# Altium PCB Webbie-V3.0.PcbDoc (part 3 of 3)
Units mil, origin at the board's own origin, x right, y up, seen from the top; angles counter-clockwise.
Board outline 3937.01 x 1574.8 mil, 2 copper layers (Top Layer, Bottom Layer), stack 62.8 mil thick; 134 components, 93 nets, 484 pads, 190 vias.
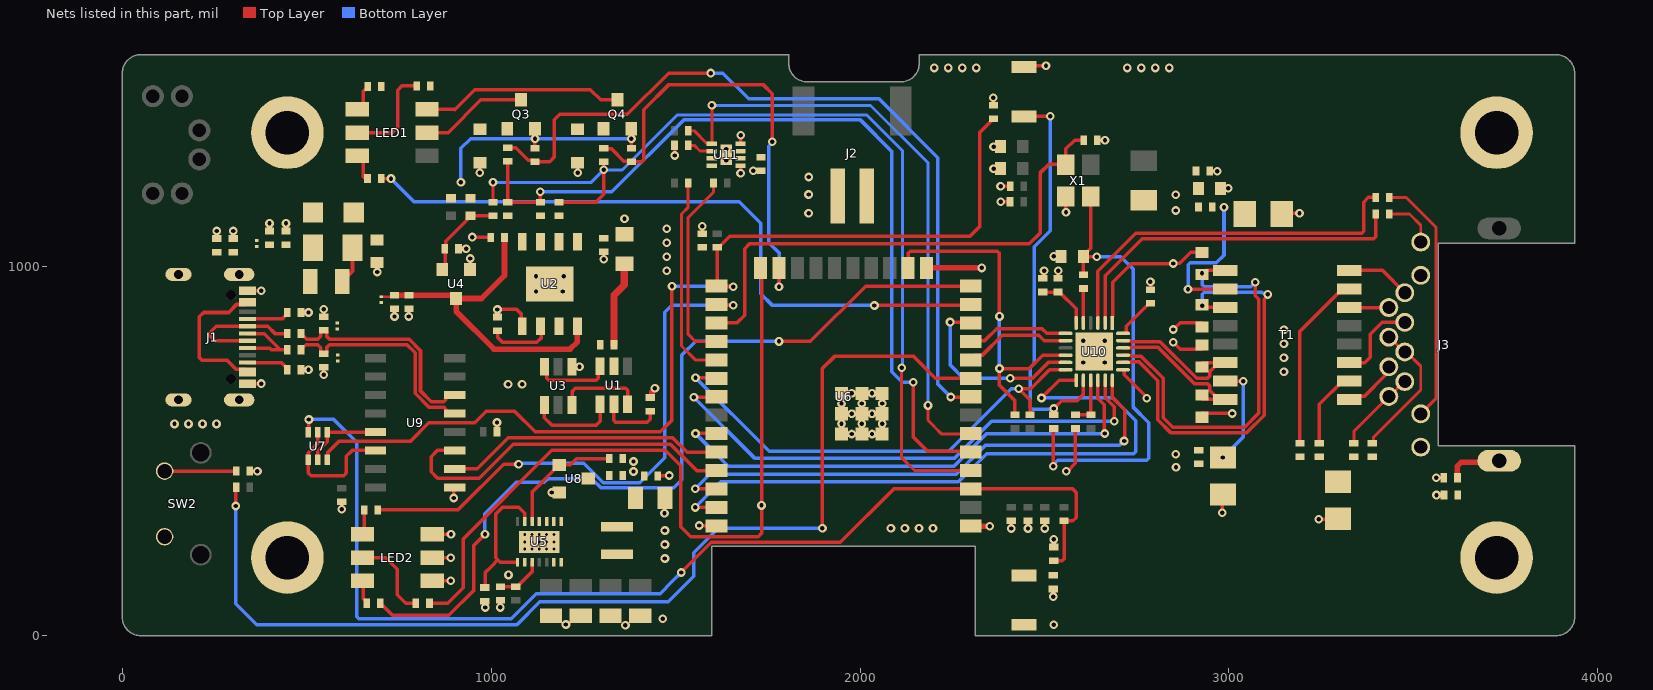
[diagram p2: the nets of this part, all layers, seen from the top]

## Via types
v1: diameter 23.62, hole 11.81, Top Layer to Bottom Layer, tented top, 190 vias

## Nets (pads, with @x,y where several pads share a name; then routed paths per layer and width w, separated by ;. In a path a pad name is that pad's centre, name@x,y a point inside that pad or via, vN(x,y) a via of type N, cw(c..) or ccw(c..) an arc to the next point about the centre after c; other vN are vias at no path point) (continued)
+3V3: C7.2 D10.1 R6.2 R8.2 U4.2 | length 240.8
  Top Layer w9.5: U4.2@867.38,992.61 875.37,1000.61 875.37,1048.22 C7.2@874.62,1048.97 876.96,1051.31 876.96,1069.29 934.75,1127.08 934.75,1131.49 941.37,1138.12 D10.1@943.78,1138.12 ; D10.1@943.78,1138.55 944.06,1138.27 1004.91,1138.27 R6.2@1005.19,1137.99
+5V_OUT: C2.1 C8.1 C9.1 C12.2 D4.2 D5.2 U2.4 U2.8 U4.3 | length 925.2
  Top Layer w7: D4.2@702,918.75 734.06,918.75 C8.1@737.98,922.67
  Top Layer w9.5: U2.4@1233.94,826.93 U2.4@1233.94,838.74
  Top Layer w15: C8.1@737.98,922.67 C9.1@776.98,922.67 896.14,922.67 904.78,914.03 U4.3@904.78,913.87 ; C2.1@1036.19,1079.32 1036.19,976.25 973.82,913.87 U4.3@904.78,913.87 ; U2.4@1233.94,826.93 1233.94,796.5 1214.02,776.58 1007.49,776.58 904.78,879.28 U4.3@904.78,913.87
ALRT: R49.1 U6.6 U11.5 | length 1661.2
  Top Layer w8: R49.1@1534.2,1368.93 1534.53,1368.59 1550.51,1368.59 1584.05,1335.06 1596.31,1335.06 U11.5@1598.22,1333.15 ; U11.5@1598.49,1335.06 v1(1598.49,1437.39) ; v1(2184.05,624.07) 2184.05,583.95 2202,566 2202,565.34 2220.34,547 2299.54,547 U6.6@2300.16,547.62
  Bottom Layer w8: v1(1598.49,1437.39) 2028.61,1437.39 2184.05,1281.95 v1(2184.05,624.07)
AVDD: C32.2 C33.1 FB2.1 J3.10 J3.12 R28.2 R29.2 R34.2 R35.2 R36.2 R37.2 U10.1 U10.19 | length 731.9
  Top Layer w9.5: U10.1@2684.25,861.95 2684.25,864.78 2685.02,865.56 2685.02,958.45 2735.17,1008.6 v1@2848.79,1008.6 ; U10.19@2712.78,720.79 2716.35,720.79 2716.38,720.75 2716.38,707.35 2777.27,646.47 2778.35,646.47 v1@2779.36,645.46 ; v1(2849.15,795.12) 2867.65,776.62 R36.2@2927.5,776.62 ; v1(2849.15,830) 2867.65,848.5 R35.2@2927.5,848.5 ; v1(2849.15,1008.96) 2849.29,1009.1 2866.87,1009.1 2896.86,1039.09 R34.2@2927.37,1039.09 ; R37.2@2927.5,603.54 2928.16,602.88 3008.52,602.88 v1(3009.18,602.21)
  other v1: 2856.5,456.5 2856.06,492.06 2777.36,643.46 2855.89,1152.51 2855.89,1195.11
B-: C1.2 U1.6 U3.3 | length 212.6
  Top Layer w9.5: U3.3@1144.39,728.57 1150.76,722.21 1150.76,697.56 1156.32,692 1285.02,692 1290.59,697.56 1290.59,725.33 U1.6@1295.39,730.13
CH: LED1.3 Q3.3 | length 275.4
  Top Layer w9.5: LED1.3@842.52,1363.31 883.26,1363.31 972.32,1452.37 Q3.3@1081,1452.37
CHG_LED: D8.1 Q3.1 R16.1 R17.2 U6.8 | length 2152.8
  Top Layer w9.5: R17.2@1045.2,1322.5 1045.47,1322.23 1066.38,1322.23 1100.14,1288.47 1114.81,1288.47 R16.1@1118.8,1284.48 1158.45,1284.48 1171.44,1297.47 1171.44,1398.44 1186,1413 1369,1413 1481,1525 v1(1595,1525) ; v1(2246.25,646.79) 2299.32,646.79 U6.8@2300.16,647.62
  Bottom Layer w9.5: v1(1595,1525) 1628,1525 1698.06,1454.94 2051.25,1454.94 2211,1295.19 2211,682.03 v1(2246.25,646.79)
CHRG: R8.1 R11.1 R17.1 U6.5 | length 2285.5
  Top Layer w9.5: R17.1@1045.2,1285.5 R8.1@1045.19,1174.99 R11.1@1133.94,1175.01 1133.47,1175.47 1133.47,1202.56 v1(1133,1203.04) ; v1(2144,687) 2144,538.34 2183.11,499.23 2298.55,499.23 U6.5@2300.16,497.62
  Bottom Layer w9.5: v1(1133,1203.04) 1327.29,1203.04 1522.09,1397.83 2001.17,1397.83 2086.44,1312.57 2086.44,715 2114.44,687 v1(2144,687)
CLK50M: C40.2 R39.1 R42.1 X1.3 | length 1270.6
  Top Layer w9.5: v1(2523.64,459) 2524.32,459.68 2524.32,560.71 R39.1@2525,561.39 ; C40.2@2605.34,1030.48 2624.99,1050.13 X1.3@2624.99,1190.3 ; R42.1@2605.47,978 2605.47,1027.85 C40.2@2605.34,1027.98 2606.32,1027 v1(2642,1027)
  Bottom Layer w9.5: v1(2523.64,459) 2523.64,462.82 2530.59,469.77 2530.59,469.91 2536.16,475.47 2776.93,475.47 2782.5,481.04 2782.5,577.42 2740,619.92 2740,994.11 2707.11,1027 v1(2642,1027)
DTR: U7.2 U7.4 U9.13 | length 216.2
  Top Layer w9.5: U7.2@530,477.2 530,499.96 555.59,525.55 U7.4@555.59,551.4 556.19,552 U9.13@686.73,552
EN: C24.1 C25.2 R27.1 SW3.2 U6.3 U7.6 | length 2999.7
  Top Layer w9.5: U7.6@504.41,551.4 505.2,552.2 505.2,585.2 v1(506,586) ; v1(1515,171) 1515,171.35 1596.47,252.81 1946.81,252.81 2091.62,397.62 U6.3@2300.16,397.62 2576.38,397.62 2586,388 2586,319.96 2577,310.96 R27.1@2556.98,310.96 ; C25.2@2524.86,203.4 2548.27,203.4 2553.84,208.96 2553.84,306.71 2552.73,307.82 R27.1@2552.73,310.96
  Bottom Layer w9.5: v1(506,586) 573,586 635.26,523.74 635.26,51.72 640.82,46.15 1054.2,46.15 1122.05,113.99 1457.99,113.99 1491.44,147.44 v1(1515,171)
ETH2X_LED1: J3.11 R41.2 | length 682.5
  Top Layer w8: R41.2@3435,1188 3480.4,1188 3560.92,1107.48 3560.92,642.12 J3.11@3520.01,601.2
ETH2X_LED2: J3.9 R43.2 | length 143.9
  Top Layer w8: R43.2@3434.5,1143 3489.79,1143 3520.01,1112.78 J3.9@3520.01,1066.95
ETH2X_RX_N: R37.1 T1.8 U10.22 | length 407.6
  Top Layer w9.5: U10.22@2712.78,779.84 2712.82,779.88 2734.15,779.88 2736.71,782.44 2807.06,782.44 2906.53,682.96 2941.9,682.96 2947.46,677.4 2947.46,664.71 2972.17,640 T1.8@2990.09,640 2989.55,640.54 R37.1@2927.5,640.54
ETH2X_RX_P: R36.1 T1.6 U10.23 | length 407.1
  Top Layer w9.5: U10.23@2712.78,799.53 U10.23@2712.78,799.53 2734.15,799.49 2736.71,796.94 2813.07,796.94 2912.54,697.46 2941.9,697.46 2947.46,703.03 2947.46,715.29 2972.17,740 T1.6@2990.09,740 2989.7,739.62 R36.1@2927.5,739.62
ETH2X_TX_N: R35.1 T1.3 U10.20 | length 1154.6
  Top Layer w9.5: U10.20@2712.78,740.47 U10.20@2712.78,740.47 2734.15,740.51 2736.71,743.06 2755.71,743.06 2807.32,691.46 2807.32,584.91 2841.72,550.5 3048.64,550.5 3095.5,597.36 3095.5,911.66 3105.06,921.22 v1(3105.06,925.04) ; v1(2928.08,894.64) 2931.9,894.64 2936.55,890 T1.3@2990.09,890
  Bottom Layer w9.5: v1(2928.08,894.64) 2927.57,895.15 2927.57,925.72 2933.14,931.29 3088.83,931.29 3092.37,927.74 3102.36,927.74 v1(3105.06,925.04)
ETH2X_TX_P: R34.1 T1.1 U10.21 | length 1134.4
  Top Layer w9.5: U10.21@2712.78,760.16 2712.82,760.12 2734.15,760.12 2736.71,757.56 2761.71,757.56 2821.82,697.46 2821.82,590.91 2847.73,565 3042.63,565 3081,603.37 3081,911.54 3071.44,921.1 v1(3071.44,957.85) ; v1(2927.06,982.44) 2930.88,982.44 2938.45,990 T1.1@2990.09,990
  Bottom Layer w9.5: v1(2927.06,982.44) 2927.06,951.86 2933.14,945.79 3058.81,945.79 3070.87,957.85 v1(3071.44,957.85)
ETHERNET: R15.1 U6.14 | length 2309.5
  Top Layer w9.5: R15.1@699.66,88.03 699.66,84.53 703.91,80.28 707.41,80.28 732.69,55 885.41,55 952.28,121.88 952.28,243.87 v1(983.26,274.86) ; v1(1780.47,797.62) 1865.38,797.62 2015.38,947.62 U6.14@2300.16,947.62
  Bottom Layer w9.5: v1(983.26,274.86) 983.26,330.82 1068.08,415.64 1144.45,415.64 1154.31,425.5 1272.58,425.5 1297.69,400.39 1495.05,400.39 1517,422.34 1517,760.62 1554.38,798 1780.09,798 v1(1780.47,797.62)
FL: LED1.1 Q4.3 | length 534.1
  Top Layer w9.5: LED1.1@842.52,1426.3 900.7,1426.3 901,1426 955.23,1480.23 1268.77,1480.23 1296.63,1452.37 Q4.3@1342.48,1452.37
FULL_LED: D9.1 Q4.1 R18.2 R31.1 U6.23 | length 1238.8
  Top Layer w9.5: R18.2@1305.08,1321.48 1306.77,1319.79 1326.34,1319.79 1359.75,1286.37 1377.98,1286.37 R31.1@1380.19,1284.16 ; R31.1@1380.27,1284.24 1408.49,1284.24 1414.06,1289.8 1414.06,1426.06 1482,1494 1737,1494 1762,1469 v1(1762,1339.06) ; v1(1780.47,945.96) U6.23@1780.47,996.83
  Bottom Layer w9.5: v1(1762,1339.06) 1762,1335.43 1753,1326.43 1753,1065.28 1781,1037.28 1781,946.48 v1(1780.47,945.96)
GND: C2.2 C3.1 C4.2 C5.2 C6.1 C7.1 C8.2 C9.2 C10.2 C11.2 C12.1 C13.1 C14.1 C15.1 C16.1 C17.1 C18.1 C19.1 C20.2 C21.1 C22.1 C23.1 C24.2 C25.1 C26.2 C27.1 C28.2 C29.2 C30.1 C31.2 C32.1 C33.2 C34.1 C35.2 C36.2 C37.1 C38.1 C39.1 C40.1 C41.1 C42.2 C43.2 C44.1 D1.2 D4.1 D6.1 D7.1 D8.2 D9.2 J1.A1B12 J1.B1A12 J2.2 LED2.2 LED2.4 LED2.6 pad.10 R2.1 R3.1 R4.2 R5.1 R7.1 R9.1 R19.1 R24.1 R44.1 R47.2 R50.1 R53.2 SW2.2 SW3.1 SW4.1 U2.1 U2.3 U2.9 U3.1 U4.1 U5.2 U5.15 U6.1 U6.15 U6.38 U6.39 U6.39_10 U6.39_11 U6.39_12 U6.39_13 U6.39_14 U6.39_15 U6.39_16 U6.39_17 U6.39_18 U6.39_19 U6.39_20 U6.39_21 U6.40 U6.41 U6.42 U6.43 U6.44 U6.45 U6.46 U6.47 U8.2 U9.1 U10.25 U11.1 U11.4 U11.9 X1.2 | length 2181.2
  Top Layer w9.5: R7.1@256,1076.5 v1(256,1097) ; C6.1@301,1076.5 v1(301,1097) ; J1.B1A12@339.29,683.19 v1(377.14,683.22) ; J1.A1B12@339.31,935.14 v1(377.18,935.11) ; C10.2@345.93,446 v1(366.43,446) ; C4.2@399,1097 v1(399,1117.5) ; C5.2@444,1097 v1(444,1117.5) ; R5.1@484.51,720.5 v1(505.01,720.5) ; R2.1@484.49,876 v1(504.99,876) ; v1(546.01,707) C14.1@546.01,727.5 ; C13.1@546.01,864.5 v1(546.01,885) ; v1(595.21,342.31) C29.2@595.21,362.81 ; C12.1@691,1012 691.33,1011.67 v1(691.33,985.68) ; v1(737.98,865.17) C8.2@737.98,885.67 ; v1(776.98,865.17) C9.2@776.98,885.67 ; LED2.2@842.52,148.5 v1(890.82,148.5) ; LED2.4@842.52,211.49 v1(890.82,211.49) ; LED2.6@842.52,274.49 842.89,274.86 v1(891.19,274.86) ; v1(898.42,373.02) 898.42,399.14 U9.1@901.27,402 ; C7.1@911.62,1048.97 v1(932.12,1048.97) ; U4.1@942.18,992.61 943.28,993.72 v1(943.28,1022.43) ; v1(948.82,1080.38) 949.35,1079.85 998.66,1079.85 C2.2@999.19,1079.32 ; v1(969.12,1254.56) 969.12,1280.84 D8.2@970,1281.72 ; C20.2@982.77,93.59 983.26,93.1 983.26,76.71 v1(983.76,76.21) ; C28.2@1015.9,552.43 v1(1015.91,577.69) ; R4.2@1016.94,863.74 v1(1016.94,884.24) 1069.05,884.24 1082.25,871.04 1082.25,840.43 U2.1@1083.94,838.74 ; v1(1025,76.56) R24.1@1025,95.49 ; v1(1164.1,388.1) U8.2@1184.59,388.1 ; U3.1@1219.2,728.57 v1(1239.69,728.57) ; D9.2@1234,1281.72 1234.42,1281.3 v1(1234.42,1254.66) ; v1(1305.3,1020.06) C3.1@1305.3,1040.56 ; C11.2@1452.04,433.49 v1@1482.47,433.49 ; 1469.47,433.49 1469.94,433.96 ; v1(1469.94,331.45) 1469.94,371.94 C19.1@1471,373 ; R50.1@1497.19,1329.56 1497.51,1329.24 1497.51,1301.9 v1(1497.84,1301.58) ; v1(1564.23,298.43) 1610.37,298.43 U6.38@1611.18,297.62 ; C27.1@1572,1089.5 v1(1572,1110) ; v1(1676.17,1253.6) U11.1@1676.17,1274.09 ; U11.4@1676.17,1333.15 1676.4,1333.38 1676.4,1356.42 v1(1676.63,1356.65) ; v1(1710.7,1260.12) C43.2@1731.2,1260.12 ; v1@2360.5,1266 C34.1@2381,1266 ; v1@2360.5,1325.55 C38.1@2381,1325.55 ; C26.2@2361.47,1437.78 v1(2361.47,1458.28) ; v1(2381,1217.86) 2381.07,1217.93 2406.75,1217.93 C35.2@2406.82,1218 ; v1(2381.07,1176) C36.2@2406.5,1176 ; v1(2409.97,290.46) C23.1@2409.97,310.96 ; SW4.1@2444.97,1541.59 2447.89,1544.51 v1(2504.29,1544.51) ; v1(2455.22,290.46) C22.1@2455.22,310.96 ; C31.2@2495.56,968.5 2497.23,970.17 2497.23,987.32 v1(2498.9,989) ; v1(2500.48,290.46) C21.1@2500.48,310.96 ; v1(2523.86,105.9) C24.2@2523.86,126.4 ; C25.1@2524.86,240.4 v1(2524.86,260.89) ; v1(2524.84,1027.98) C40.1@2545.34,1027.98 ; C30.1@2537,968.5 v1(2537,989) ; X1.2@2558.06,1190.3 2558.21,1190.15 v1(2558.21,1147.9) ; v1(2559,446) 2562.82,446 2583.82,467 C37.1@2583.82,561.41 ; R47.2@2643.49,1343.05 v1(2663.98,1343.05) ; v1(2787.17,959.71) 2787.43,959.44 2787.43,938.38 R44.1@2787.7,938.12 ; C33.2@2947.87,1259.22 v1(2968.37,1259.22) ; C32.1@2977.37,1212.61 v1(2997.87,1212.61) ; v1(2982,333) 2982,381.5 C41.1@2983.5,383 ; C39.1@3143,1143 3144.87,1144.87 v1(3191.45,1144.87) ; v1(3243.83,315.64) 3294.64,315.64 C44.1@3296,317 ; v1(3562,428) R53.2@3582.5,428 ; v1(3562.5,381) C42.2@3583,381
  Top Layer w15: R3.1@1431.03,645.48 1434.53,645.48 1436.03,646.98 1436.03,660.41 1443.91,668.3 v1(1443.91,670.63) ; U6.15@2180.47,996.83 v1(2329.69,996.83) ; U6.1@2300.16,297.62 2300.64,297.14 2351.06,297.14 v1(2351.54,296.65)
  other v1: 1364.01,28.31 1202.65,30.18 2524.86,29.57 1465,46 1047.07,164.59 1471,209 1471,247 1471,285 2083.67,290.79 2121.67,290.79 2159.67,290.79 2197.67,290.79 1482.94,433.96 141.51,574 179.51,574 217.51,574 255.51,574 1045.9,681.37 1083.9,681.37 3149,715 2663.56,740.47 2605.47,740.51 3149,753 3149,791 2663.56,798.95 2605.47,799.53 3149,829 1121.44,932.75 1194,932.75 1121.44,974.5 1196.44,974.5 1475.94,989 1475.94,1027 1475.94,1065 1475.94,1103 1860.52,1145 1860.52,1195.74 1860.85,1243.18 2362,1266 1637.2,1288.12 1637.2,1319.37 2362,1325.55 2201,1539 2239,1539 2277,1539 2315,1539 2724,1539 2762,1539 2800,1539 2838,1539
IO0: C26.1 C27.2 R30.1 R39.2 SW4.2 U6.25 U7.3 U10.14 | length 3859.6
  Top Layer w9.5: U7.3@555.59,476.6 557.7,478.71 557.7,497.49 587.79,527.59 781.83,527.59 831.24,577 955.9,577 987.15,608.25 1063.4,608.25 1119.22,552.43 1458.57,552.43 1490.19,584.05 v1(1490.19,947.23) ; v1(1656,945.96) 1612.85,945.96 U6.25@1611.18,947.62 1613,949.44 R30.1@1613,1052.5 1616.5,1052.5 1647,1083 2298,1083 2325.12,1110.12 2325.12,1364.72 2356.74,1396.34 2361.18,1400.78 C26.1@2361.47,1400.78 ; SW4.2@2444.97,1407.73 v1(2515.54,1407.73) ; R39.2@2525,598.39 2525.22,598.61 2525.22,615.57 v1(2525.44,615.79) 2546.3,636.65 2588.55,636.65 2605.47,653.57 U10.14@2605.47,692.22
  Bottom Layer w9.5: v1(1490.19,947.23) 1654.73,947.23 v1(1656,945.96) ; v1(2515.54,1407.73) 2515.54,1097.72 2472.34,1054.52 2472.34,737.46 2461,726.12 2461,619.56 2466.57,613.99 2523.64,613.99 v1(2525.44,615.79)
IO4: R26.1 U6.26 | length 1513.3
  Top Layer w9.5: R26.1@692.54,340.6 909.94,340.6 1034.09,464.76 v1(1074.39,464.76) ; U6.26@1611.18,897.62 1612.8,896 v1(1656,896)
  Bottom Layer w9.5: v1(1074.39,464.76) 1077.09,467.46 1251.13,467.46 1303.69,414.89 1402.93,414.89 1470.47,482.44 1470.47,876.29 1490.19,896 v1(1656,896)
IO13_RMII_EMAC_RX_ER: R40.1 U6.16 U10.10 | length 941.9
  Top Layer w9.5: U6.16@2130.47,996.83 2130.09,997.21 2130.09,1036.43 2135.66,1042 2372.43,1042 2378,1036.43 v1(2378,865.34) ; R40.1@2419.92,598.41 2419.92,636.49 2378,678.41 v1(2378,724) 2458.88,724 2495.04,760.16 U10.10@2557.22,760.16
  Bottom Layer w9.5: v1(2378,724) v1(2378,865.34)
IO16_OSC_EN: R47.1 U6.27 X1.1 | length 1427.7
  Top Layer w9.5: U6.27@1611.18,847.62 1665.62,847.62 1687,869 1687,1048.8 1700.38,1062.19 2459.13,1062.19 2488,1091.06 2488,1254 2511.27,1277.27 X1.1@2557.7,1277.27 ; X1.1@2556.84,1278.13 X1.1@2558.06,1276.92 2558.06,1319.43 2581.68,1343.05 R47.1@2606.49,1343.05
IO18_RMII_MDIO: R38.1 U6.30 U10.12 | length 1319.1
  Top Layer w9.5: v1(1554,699) 1609.8,699 U6.30@1611.18,697.62 ; R38.1@2461,598.41 2461,638.42 v1(2430,669.42) 2462.32,669.42 2513.68,720.79 U10.12@2557.22,720.79
  Bottom Layer w9.5: v1(1554,699) 1753.42,499.58 2240.1,499.58 2409.95,669.42 v1(2430,669.42)
IO19_RMII_EMAC_TXD0: U6.31 U10.17 | length 1433.1
  Top Layer w9.5: v1(1549.62,645.88) 1609.44,645.88 U6.31@1611.18,647.62 ; U10.17@2664.53,692.22 2664.53,644.64 2688.92,620.24 v1(2688.92,581.25)
  Bottom Layer w9.5: v1(1549.62,645.88) 1715.29,480.21 2255.36,480.21 2356.39,581.25 v1(2688.92,581.25)
IO21_RMII_EMAC_TX_EN: U6.33 U10.16 | length 1392.1
  Top Layer w9.5: v1(1554,548) 1610.8,548 U6.33@1611.18,547.62 ; U10.16@2644.84,692.22 2644.84,643.82 2662.36,626.3 2662.36,548.59 v1(2663.14,547.81)
  Bottom Layer w9.5: v1(1554,548) 1643,459 2254.65,459 2343.46,547.81 v1(2663.14,547.81)
IO22_RMII_EMAC_TXD1: U6.36 U10.18 | length 1453.5
  Top Layer w9.5: v1(1553.3,398) 1610.81,398 U6.36@1611.18,397.62 ; U10.18@2684.21,692.22 2684.21,645.46 2717.65,612.02 2717.65,529.43 v1(2715.78,527.56)
  Bottom Layer w9.5: v1(1553.3,398) 1592.3,437 2260.91,437 2339.41,515.5 2703.15,515.5 2715.21,527.56 v1(2715.78,527.56)
IO23_RMII_MDC: U6.37 U10.13 | length 1793.6
  Top Layer w9.5: v1(1553,347.62) U6.37@1611.18,347.62 ; v1(2492,644.38) 2539.84,692.22 U10.13@2585.79,692.22
  Bottom Layer w9.5: v1(1553,347.62) 1622.38,417 2266.78,417 2343.28,493.5 2742.09,493.5 2747.66,499.06 2747.66,582.01 2685.26,644.42 v1(2492,644.38)
IO25_RMII_EMAC_RXD0: U6.10 U10.8 | length 291
  Top Layer w9.5: U6.10@2300.16,747.62 2313.12,760.59 2332.04,760.59 2385.95,814.5 2484.35,814.5 2499.33,799.53 U10.8@2557.22,799.53
IO26_RMII_EMAC_RXD1: U6.11 U10.7 | length 276.6
  Top Layer w9.5: U6.11@2300.16,797.62 2302.5,799.96 2338.37,799.96 2370.41,832 2493.27,832 2506.06,819.21 U10.7@2557.22,819.21
IO27_RMII_EMAC_CRS_DV: U6.12 U10.11 | length 519.4
  Top Layer w9.5: v1(2244.07,850) 2297.78,850 U6.12@2300.16,847.62 ; v1(2407.42,697.44) 2467.61,697.44 2510.64,740.47 U10.11@2557.22,740.47
  Bottom Layer w9.5: v1(2244.07,850) 2244.07,733.61 2280.24,697.44 v1(2407.42,697.44)
IO33: C10.1 R20.1 SW2.1 U6.9 | length 3143.3
  Top Layer w9.5: SW2.1@114.84,446 C10.1@308.93,446 ; v1(307.76,351.42) 308.34,352.01 308.34,401.41 R20.1@308.93,401.99 ; v1(1898,291) 1898,724 1932,758 2144,758 2204.38,697.62 U6.9@2300.16,697.62
  Bottom Layer w9.5: v1(307.76,351.42) 307.76,86.73 364.48,30 1070.01,30 1132,91.99 1479.99,91.99 1549,161 1549,224.75 1615.25,291 v1(1898,291)
"LOW BATT": R13.1 U6.13 | length 1854.1
  Top Layer w9.5: R13.1@701.78,1238.97 v1@728.35,1238.97 ; v1(2039,895) 2297.54,895 U6.13@2300.16,897.62
  Bottom Layer w9.5: v1(728.38,1238.94) 790.84,1176.47 1672.53,1176.47 1730.59,1118.41 1730.59,927.06 1762.66,895 v1(2039,895)
NetC1_1: C1.1 R1.1 U1.5 | length 231.9
  Top Layer w20: C1.1@1333.01,788.65 1333.08,788.72 1333.08,922.59 1361,950.51 R1.1@1361,1009
NetC6_2: C6.2 J1.13 R7.2
NetC20_1: C20.1 U5.1 U5.13 | length 380.6
  Top Layer w9.5: C20.1@982.77,130.59 983.96,131.78 983.96,171.24 1001.16,188.44 1018.35,205.64 ; U5.1@1071.44,199.06 1024.94,199.06 1012.5,211.49 1012.5,329.86 1030.64,348 1074.99,348 1091.1,331.89 U5.13@1091.1,316.35
NetC39_2: C39.2 R28.1 T1.2 | length 405.3
  Top Layer w9.5: v1(2889,939) 2989.09,939 T1.2@2990.09,940
  Bottom Layer w9.5: v1@2889.22,939.22 2889.22,1004.93 2894.78,1010.5 2965.5,1010.5 2986.62,1031.62 v1(2986.62,1161.29)
NetC41_2: C41.2 R29.1 T1.7 | length 279
  Top Layer w9.5: T1.7@2990.09,690 2990.19,689.89 v1(3039.13,689.89)
  Bottom Layer w9.5: v1(2983.5,483) 3039.13,538.63 v1(3039.13,689.89)
NetC42_1: C42.1 J3.14 R53.1 | length 150.6
  Top Layer w15: R53.1@3619.5,428 3619.5,459.5 3630.48,470.48 3729.05,470.48 J3.14@3732.61,474.04
NetC44_2: C44.2 R46.1 R48.1 R51.1 R52.1
NetD5_1: D5.1 FB1.2
NetF1_2: F1.2 FB1.1 | length 103.5
  Top Layer w9.5: F1.2@596.31,960 624.17,987.86 FB1.1@624.17,1051.99
NetJ1_A5: J1.A5 R2.2 | length 117.6
  Top Layer w9.5: J1.A5@339.29,858.39 433.38,858.39 447.49,872.5 R2.2@447.49,876
NetJ1_A6: J1.A6 J1.B6 R23.2 | length 217.1
  Top Layer w9.5: J1.B6@339.29,779.65 399.35,779.65 404,775 447.44,775 R23.2@447.49,774.94 ; J1.A6@339.65,818.66 384.78,818.66 428.49,774.95
NetJ1_A7: J1.A7 J1.B7 R22.2 | length 340.9
  Top Layer w9.5: J1.A7@339.29,799.33 251.69,799.33 237.48,813.54 237.48,821.41 254.77,838.7 J1.B7@339.29,838.7 394.3,838.7 414.08,818.92 R22.2@447.49,818.92
NetJ1_B5: J1.B5 R5.2 | length 118.5
  Top Layer w9.5: J1.B5@339.29,740.28 431.23,740.28 447.51,724 R5.2@447.51,720.5
NetJ3_1: J3.1 T1.16 | length 175.8
  Top Layer w9.5: T1.16@3325.91,990 3416.25,990 J3.1@3476.7,929.55
NetJ3_2: J3.2 T1.14 | length 107.7
  Top Layer w9.5: T1.14@3325.91,890 3326.52,889.39 J3.2@3433.39,889.39
NetJ3_3: J3.3 T1.11 | length 232.7
  Top Layer w9.5: T1.11@3325.91,740 3368.65,740 3383,754.35 3383,816.94 3415.3,849.24 J3.3@3476.7,849.24
NetJ3_4: J3.4 J3.5 R51.2 | length 382.5
  Top Layer w8: R51.2@3388.63,521.5 3392.03,524.9 3392.03,537.81 3520.01,665.79 3520.01,730.35 3481.44,768.92 J3.5@3476.7,768.92 3475.13,768.92 3434.97,809.08 J3.4@3433.39,809.08
NetJ3_6: J3.6 T1.9 | length 152.1
  Top Layer w9.5: T1.9@3325.91,640 3334.3,648.39 3366.51,648.39 3425.42,707.3 3425.42,720.79 J3.6@3433.39,728.76
NetJ3_7: J3.7 J3.8 R52.2 | length 226.2
  Top Layer w8: R52.2@3338.49,521.5 3338.49,553.55 J3.8@3433.39,648.45 3434.97,648.45 3475.13,688.61 J3.7@3476.7,688.61
NetL1_1: L1.1 U5.8 U5.9
NetL1_2: L1.2 U5.6 U5.7
NetLED1_2: LED1.2 R9.2 | length 68.1
  Top Layer w9.5: LED1.2@653.54,1426.3 653.54,1475.07 659.11,1480.63 661.02,1480.63 665.27,1484.88 R9.2@665.27,1488.38
NetLED1_4: LED1.4 R19.2 | length 255.5
  Top Layer w9.5: LED1.4@653.54,1363.31 731.46,1363.31 746.33,1378.18 746.33,1478.14 758.49,1490.3 R19.2@797.91,1490.3
NetLED1_6: LED1.6 R13.2 | length 69.3
  Top Layer w9.5: LED1.6@653.54,1300.32 653.54,1244.49 659.03,1239 R13.2@664.74,1239
NetLED2_1: LED2.1 R15.2 | length 64.2
  Top Layer w9.5: LED2.1@653.54,148.5 653.54,100.65 662.66,91.53 R15.2@662.66,88.03
NetLED2_3: LED2.3 R25.2 | length 234.4
  Top Layer w9.5: LED2.3@653.54,211.49 714.51,211.49 745.79,180.21 745.79,110.49 768.29,88 R25.2@796,88
NetLED2_5: LED2.5 R26.2 | length 66.9
  Top Layer w9.5: LED2.5@653.54,274.49 655.54,276.48 R26.2@655.54,340.6
NetR3_2: R3.2 U1.2 | length 170.5
  Top Layer w9.5: U1.2@1332.8,626.98 1331.98,626.17 1331.98,583.48 1337.54,577.91 1422.02,577.91 1431.03,586.92 R3.2@1431.03,608.48
NetR4_1: R4.1 U2.2 | length 179.6
  Top Layer w9.5: R4.1@1016.94,826.74 1016.94,823.18 1017.63,822.49 1017.63,808.03 1030.73,794.93 1123.72,794.93 1135.22,806.43 1135.22,837.45 U2.2@1133.94,838.74
NetR10_2: R10.2 U2.6
NetR11_2: R11.2 U2.7
NetR14_1: R14.1 R24.2 U5.3 | length 125.5
  Top Layer w9.5: R24.2@1025,133.49 1025.5,132.99 1066.21,132.99 R14.1@1066.71,132.49 ; R14.1@1070.21,132.49 1110.81,173.09 U5.3@1110.81,199.06
NetR41_1: R41.1 U10.3 | length 1022.3
  Top Layer w9.5: U10.3@2644.84,847.78 2644.84,987.47 2747.73,1090.36 3359.44,1090.36 3365,1095.92 3365,1175.03 3377.97,1188 R41.1@3398,1188
NetR43_1: R43.1 U10.2 | length 966.2
  Top Layer w9.5: U10.2@2664.53,847.78 2664.53,975.59 2764.79,1075.86 3391.94,1075.86 3397.5,1081.42 R43.1@3397.5,1143
NetR44_2: R44.2 U10.24 | length 120
  Top Layer w9.5: U10.24@2712.78,819.21 2721.3,819.21 2721.34,819.25 2721.34,838.25 2784.2,901.12 R44.2@2787.7,901.12
NetR46_2: R46.2 T1.10 | length 212.5
  Top Layer w9.5: R46.2@3245,521.5 3245,627 3308,690 T1.10@3325.91,690
NetR48_2: R48.2 T1.15 | length 484.2
  Top Layer w9.5: R48.2@3192.63,521.5 3192.63,824.63 3308,940 T1.15@3325.91,940
NetR50_2: R50.2 U11.6 | length 70.7
  Top Layer w8: R50.2@1534.19,1329.56 1534.57,1329.18 1550.5,1329.18 1566.22,1313.46 U11.6@1598.22,1313.46
NetU1_1: U1.1 U3.4 | length 243.8
  Top Layer w9.5: U3.4@1144.39,625.43 1144.39,591.16 1165.05,570.5 1284.28,570.5 1295.39,581.61 U1.1@1295.39,626.98
NetU1_3: U1.3 U3.6 | length 231.3
  Top Layer w9.5: U3.6@1219.2,625.43 1219.2,661.59 1228.24,670.63 1364.56,670.63 1370.2,665 U1.3@1370.2,626.98
nRST: C37.2 R45.1 U10.15 | length 136.1
  Top Layer w9.5: C37.2@2583.82,598.41 R45.1@2625.82,598.41 2625.2,599.03 U10.15@2625.16,692.22 U10.15@2625.16,692.22
OR_3.3V: D10.2 D11.2 Q3.2 Q4.2 R16.2 R31.2 | length 670.3
  Top Layer w9.5: Q3.2@1118.4,1373.63 1118.8,1373.23 v1(1118.8,1347.35) R16.2@1118.8,1321.48 ; Q4.2@1379.89,1373.63 1380.27,1373.25 v1(1380.27,1347.24) R31.2@1380.27,1321.24
  Bottom Layer w9.5: v1(918,1228.85) 918,1321 944.35,1347.35 v1(1118.8,1347.35) 1118.86,1347.3 1380.21,1347.3 v1(1380.27,1347.24)
OSCIN: R42.2 U10.5 | length 93.2
  Top Layer w9.5: U10.5@2605.47,847.78 R42.2@2605.47,941
OUT/BATT+: C3.2 C11.1 C19.2 C43.1 J2.1 R1.2 R12.1 R21.1 U2.5 U5.10 U5.11 U8.3 U11.2 U11.3 | length 2.8
  Top Layer w15: J2.1@2018,1192 J2.1@2020,1190
  other v1: 1385.85,445.07 1385.85,471.99 1361.5,1129.91
RST: R12.2 R21.2 U5.12 U8.1 | length 327.9
  Top Layer w9.5: U5.12@1110.81,309.29 1110.81,389.12 1171.23,449.54 1171.23,451.51 1182.62,462.9 1214.34,462.9 1231.4,479.96 R21.2@1320.07,479.96
RTS: U7.1 U7.5 U9.14 | length 361.6
  Top Layer w9.5: U7.5@530,551.4 530,521.48 504.41,495.89 U7.1@504.41,476.6 504.41,440.98 511.89,433.5 600.21,433.5 607.71,441 607.71,486.67 623.04,502 U9.14@686.73,502
RXD: U6.34 U9.2 | length 760.5
  Top Layer w9.5: U9.2@901.27,452 962.2,452 1046.55,536.35 1491.76,536.35 1531.14,496.97 U6.34@1610.53,496.97
SCL: R33.1 U6.29 U11.7 | length 560
  Top Layer w8: R33.1@1534.2,1226.78 1534.2,1161.2 1516,1143 1516,785 1553.38,747.62 U6.29@1611.18,747.62
SDA: R32.1 U6.28 U11.8 | length 523.4
  Top Layer w8: R32.1@1602.95,1226.78 1602.95,1202.1 1534.2,1133.34 1534.2,816.8 1553.38,797.62 U6.28@1611.18,797.62
STDBY: R6.1 R10.1 R18.1 U6.4 | length 2529.4
  Top Layer w8: v1(1004.91,1228.85) 1004.91,1175.27 R6.1@1005.19,1174.99 ; v1(2113,726) 2113,482.34 2147.71,447.62 U6.4@2300.16,447.62
  Top Layer w9.5: R10.1@1183.94,1175 1283.79,1175 1305.08,1196.29 R18.1@1305.08,1284.48
  Bottom Layer w8: v1(1004.91,1228.85) 1271.37,1228.85 v1@1302.76,1260.24 ; v1(1305.08,1262.56) 1355.21,1262.56 1504.23,1411.58 2018.42,1411.58 2114.65,1315.35 2114.65,727.65 v1(2113,726)
TXD: U6.35 U9.3 | length 961.6
  Top Layer w9.5: U9.3@901.16,501.88 853.96,501.88 837.25,485.18 837.25,444.4 854.65,427 967.68,427 1060,519.31 1486.13,519.31 1558.99,446.46 1610.02,446.46 U6.35@1611.18,447.62
USB_N: C13.2 D6.2 R22.1 U9.6 | length 604.4
  Top Layer w9.5: R22.1@484.49,818.92 484.49,815.42 488.74,811.17 492.24,811.17 500.16,803.25 530,803.25 538.26,811.51 538.26,823.25 542.51,827.5 C13.2@546.01,827.5 549.51,827.5 553.76,823.25 553.76,811.35 561.85,803.25 778.01,803.25 808.5,772.76 808.5,663 837.25,634.25 871.69,634.25 877.25,639.81 877.25,645.75 883.5,652 U9.6@901.27,652
USB_P: C14.2 D7.2 R23.1 U9.5 | length 603.6
  Top Layer w9.5: R23.1@484.49,774.94 484.49,778.44 488.74,782.69 492.24,782.69 498.3,788.75 530,788.75 538.26,780.49 538.26,768.75 542.51,764.5 C14.2@546.01,764.5 549.51,764.5 553.76,768.75 553.76,780.65 561.85,788.75 772,788.75 794,766.75 794,656.99 831.24,619.75 871.69,619.75 877.25,614.19 877.25,608.25 883.5,602 U9.5@901.27,602
VDDCR: C30.2 C31.1 U10.6 | length 147.4
  Top Layer w9.5: C31.1@2495.56,931.5 C30.2@2537,931.5 2540.5,931.5 2585.79,886.21 U10.6@2585.79,847.78
VUSB: C4.1 C5.1 D1.1 F1.1 J1.A4B9 J1.B4A9 | length 403.4
  Top Layer w10: J1.B4A9@339.29,714.69 332.23,721.75 309,721.75 284.56,746.18 216.87,746.18 209,754.05 209,864.29 220.71,876 288.41,876 309.88,897.47 333.1,897.47 J1.A4B9@339.29,903.66
WIFI: R25.1 U6.24 | length 2066.9
  Top Layer w9.5: R25.1@833,88 882,88 924,130 924,261.87 1164.34,502.21 1472.37,502.21 1514,460.58 1514,295 1540.69,268.31 1723.87,268.31 1733,277.44 v1(1733,353) 1733,994.31 U6.24@1730.47,996.83
pads on no net: J1.7 J1.8 J1.A8 J1.B8 J2.3 J2.4 J3.13 SW1.1 SW1.3 SW1.5 SW1.6 SW2.3 SW2.4 T1.4 T1.5 T1.12 T1.13 U1.4 U3.2 U3.5 U5.14 U6.7 U6.17 U6.18 U6.19 U6.20 U6.21 U6.22 U6.32 U9.7 U9.8 U9.9 U9.10 U9.11 U9.12 U9.15 U10.4

## Polygon pours and split planes (outlines as drawn)
GND on Top Layer "NONET_L-01_P-001" (solid, pour order 29): 1585,13 1585,239.22 1597.76,251.98 2313.02,251.98 2325,240 2325,15 2330,10 3883,10 ccw(c3883,54) 3927,54 3927,505 3564.1,505 3555,514.1 3555,1061.43 3569.57,1076 3925,1076 3925,1523 ccw(c3885,1523) 3885,1563 2172,1563 2172,1551.46 cw(c2109.79,1551.46) 2109.79,1489.25 1851.75,1489.25 cw(c1851.75,1546) 1795,1546 1795,1562 50.2,1562 ccw(c50.19,1524.81) 13,1524.8 13,54 ccw(c54,54) 54,13
+3.3_OUT on Top Layer "NONET_L-01_P-001" (solid, pour order 39): 2601.36,1304.47 2601.36,1249.36 2648.61,1249.36 2658.84,1259.59 2804.83,1259.59 2804.83,1400.17 2787.66,1417.34 2567.34,1417.34 2493.05,1343.05 2426,1343.05 2426,1248.5 2431,1248.5 2434.5,1245 2434.5,1126.35 2452.5,1126.35 2452.5,1230.18 2456,1233.68 2456,1283.5 2564.09,1391.59 2714.58,1391.59 2733.17,1373 2733.17,1314.71 2658.84,1314.71 2648.61,1304.47
OUT/BATT+ on Top Layer "NONET_L-01_P-001" (solid, pour order 5): 1411,417.52 1414.01,420.53 1423.57,420.53 1423.57,445.53 1414.52,445.53 1411,449.04 1411,492.03 1410.57,492.46 1348.07,492.46 1348.07,371.96 1329.11,353 1156.73,353 1125.77,322.04 1125.77,297.48 1154.9,297.48 1154.9,331.6 1155.03,331.6 1160.35,336.92 1404.92,336.92 1411,343
OUT/BATT+ on Top Layer "NONET_L-01_P-001" (solid, pour order 7): 1731.2,1287.87 1977.24,1287.87 1998.32,1266.8 1998.32,1117.2 2037.68,1117.2 2037.68,1274.28 1992.59,1319.37 1731.2,1319.37
OUT/BATT+ on Top Layer "NONET_L-01_P-001" (solid, pour order 37): 1336.5,1068.06 1336,1068.56 1270.18,1068.56 1245.75,1044.13 1222.13,1044.13 1222.13,1107.53 1321.62,1107.53 1336.5,1122.41 1336.5,1147 1406.84,1147.01 1434.48,1174.65 1434.09,1175.05 1434.09,1420.85 1492.29,1479.06 1708.36,1479.06 1742.94,1444.48 1742.94,1287.87 1662.39,1287.87 1662.39,1319.37 1718.58,1319.37 1721.48,1322.27 1721.47,1322.28 1721.47,1438.01 1721.42,1438.01 1700.41,1459.02 1499.97,1459.02 1453.98,1413.03 1453.98,1162.33 1414.06,1122.41 1414.06,1068.06
OUT/BATT+ on Top Layer "NONET_L-01_P-001" (solid, pour order 6): 1281.44,365.21 1293.65,353 1293.65,343 1223.96,343 1223.96,353 1231.42,353 1245.22,366.81 1245.22,441.64 1281.44,441.64 1245.22,441.64 1281.44,441.64
+3.3V_IN on Top Layer "NONET_L-01_P-001" (solid, pour order 9): 1125.77,210.87 1154.9,210.87 1154.9,157.99 1188,157.99 1192,153.99 1192.02,154.01 1434.32,154.01 1434.32,114.01 1434.31,113.99 1132,113.99 1132,153.99 1125.77,160.23 1125.77,187.25
+3.3_OUT on Top Layer "NONET_L-01_P-001" (solid, pour order 24): 2407.42,570.41 2473.5,570.41 2473.5,552.41 2473.5,447.62 2493.12,428 2582.32,428 2613.32,459 2613.32,570.41 2638.32,570.41 2638.32,426.32 2622.53,410.53 2412.22,410.53 2407.42,415.34
GND on Top Layer "NONET_L-01_P-001" (solid, pour order 35): 1132,73.99 1132,11 1490,11 1490,74.01 1132.02,74.01
GND on Top Layer "NONET_L-01_P-001" (solid, pour order 34): 2411.11,45.71 2411.11,13.43 2553.84,13.43 2553.84,45.71
GND on Top Layer "NONET_L-01_P-001" (solid, pour order 33): 1958.95,1266.8 1827.49,1266.8 1827.49,1117.2 1958.95,1117.2
VUSB on Top Layer "NONET_L-01_P-001" (solid, pour order 26): 411.5,1051 360.52,1051 360.52,1058.87 385.37,1058.87 386.5,1060 386.5,1069 456.5,1069 456.5,1051 456.49,1050.99 456.49,1008 471.02,993.46 529.38,993.46 529.38,926.54 440.57,926.54 405.88,891.85 316.65,891.85 316.65,915.47 397.54,915.47 411.5,929.43
+3.3_OUT on Top Layer "NONET_L-01_P-001" (solid, pour order 31): 336.93,414.49 336.93,389.49 581.39,389.49 582.71,390.81 715.31,390.81 715.5,391 715.5,413 657.95,413 653.76,408.81 582.71,408.81 577.02,414.49 354.93,414.49
AVDD on Top Layer "NONET_L-01_P-001" (solid, pour order 19): 2926.5,1189.24 2932.37,1195.11 2932.37,1234.22 2919.87,1246.72 2919.87,1271.72 2901.87,1271.72 2901.87,1207.62 2733.17,1207.62 2733.17,1114.87 2740.04,1108 2923.03,1108 2926.5,1111.47
AVDD on Top Layer "NONET_L-01_P-001" (solid, pour order 16): 2785,527.56 2878.5,527.56 2878.5,474.5 2930.5,474.5 2930.5,284 3054,284 3054,421.54 3054.46,422 3054.46,452 3140.5,452 3140.5,260 3365,260 3365,408.02 3494.8,537.81 3545.6,537.81 3545.6,484.5 3510.5,484.5 3415,389 3415,221 2785,221
+3.3V_IN on Top Layer "NONET_L-01_P-001" (solid, pour order 11): 1054.21,104.49 1082.5,104.49 1132.02,154.01 1192.02,154.01 1192.02,114.01 1192,113.99 1130.4,113.99 1086.4,69.99 1054.21,69.99
GND on Bottom Layer "NONET_L-01_P-001" (solid, pour order 27): 1585,13 1585,239.22 1597.76,251.98 2313.02,251.98 2325,240 2325,15 2330,10 3883,10 ccw(c3883,54) 3927,54 3927,505 3564.1,505 3555,514.1 3555,1061.43 3569.57,1076 3925,1076 3925,1523 ccw(c3885,1523) 3885,1563 2172,1563 2172,1551.46 cw(c2109.79,1551.46) 2109.79,1489.25 1851.75,1489.25 cw(c1851.75,1546) 1795,1546 1795,1562 50.2,1562 ccw(c50.19,1524.81) 13,1524.8 13,54 ccw(c54,54) 54,13
OUT/BATT+ on Bottom Layer "NONET_L-01_P-001" (solid, pour order 38): 1348.07,421.46 1349,420.53 1423.57,420.53 1423.57,1130.27 1406.84,1147.01 1406.83,1147 1336.5,1147 1336.5,1068.06 1390.5,1014.06 1390.5,516.89 1366.07,492.46 1348.07,492.46
AVDD on Bottom Layer "NONET_L-01_P-001" (solid, pour order 20): 2838.5,665.5 2833,660 2770.23,660 2761,650.77 2761,633.19 2769.47,624.73 2769.75,625.01 2834,625.01 2838.5,620.5 2838.5,442 2873,442 2873,566.06 2885.94,579 3015,579 3024,588 3024,616 3014.99,625.01 3014.99,625.04 2887.54,625.04 2873,639.58 2873,1157.31 2838.5,1157.31
AVDD on Bottom Layer "NONET_L-01_P-001" (solid, pour order 17): 3545.37,951.2 3545.43,951.14 3545.6,951.31 3545.6,1002.38 3519.76,1002.38 3185.15,1337 2851,1337 2826,1312 2826,1157.31 2849.15,1134.16 2862.62,1134.16 2888.08,1159.61 2888.08,1284.26 2900.05,1296.24 3165.23,1296.24 3510.26,951.2
+3.3_OUT on Bottom Layer "NONET_L-01_P-001" (solid, pour order 25): 2498.09,476.38 2498.1,476.38 2499.01,476.38 2499.01,475.48 2499,475.47 2499,338.96 2407.42,338.96 2407.42,476.38

## Other copper
Top Layer:
  rectangle net +3.3_OUT: 811.02,1115.74 904.78,1150.37
  rectangle net +5V_OUT: 1072.13,1044.13 1095.75,1091.82
  rectangle net NetC41_2: 2948.5,453 3018.18,513.23
  rectangle net NetC41_2: 2905.5,493.5 3018.18,513
  rectangle net NetC39_2: 3013,1108 3073,1178
  rectangle net NetC39_2: 2945.5,1149.5 3073,1174.5
  rectangle net NetC44_2: 3261,387 3331,482
  rectangle net IO0: 1559.5,1043.5 1625.5,1061.5
  rectangle net +3.3_OUT: 2397.47,338.96 2565.23,379.91
  rectangle net EN: 2512.36,154.4 2536.36,212.4
  rectangle net EN: 2444.97,154.4 2536.36,172.4
  rectangle net +3.3_OUT: 2300.16,338.96 2565.23,356.96
  region net IO0: 2478.83,1391.59 2478.83,1410.84 2351.99,1410.84 2351.99,1391.59
  region net SCL: 1525.19,1299.69 1525.19,1287.87 1612,1287.87 1612,1299.69
  region net SCL: 1525.19,1299.69 1525.19,1214.28 1543.92,1214.28 1543.92,1299.69
  region net SDA: 1584.44,1274.09 1584.44,1214.28 1612,1214.28 1612,1274.09
  rectangle net IO33: 299.93,389.49 317.93,458.5
  rectangle net CHG_LED: 1032.7,1313.5 1057.7,1374.65
  rectangle net CHG_LED: 952.28,1356.53 1043.6,1388.02
  rectangle net FULL_LED: 1216.28,1356.53 1305.08,1388.02
  rectangle net FULL_LED: 1292.58,1312.48 1317.58,1373.63
  rectangle net NetC42_1: 3610.5,368.5 3629,440.5
  rectangle net NetC44_2: 3180.13,475.5 3401.13,493.5
  rectangle net NetL1_1: 1165.14,297.48 1194.27,321.1
  rectangle net NetL1_2: 1165.14,187.25 1194.27,210.87
  region net RST: 1329.07,421.46 1329.07,492.46 1311.07,492.46 1311.07,421.46
  rectangle net NetL1_2: 1165.14,187.7 1254,207.41
  rectangle net NetL1_1: 1260.78,282.96 1384.09,308.55
  rectangle net NetL1_1: 1165.14,309.29 1254,329
  rectangle net NetL1_2: 1247.28,187.7 1384.09,233.75
  rectangle net NetL1_2: 1260.78,208.15 1384.09,233.75
  rectangle net NetL1_1: 1247.28,282.96 1384.09,329
  rectangle net B-: 1287.01,725.33 1305.01,801.15
  rectangle net +5V_OUT: 673.5,1057 750.48,1087
  rectangle net +5V_OUT: 725.48,913.67 750.48,1087
  rectangle net +5V_OUT: 725.48,916.68 920.92,931.98
  rectangle net NetC1_1: 1324.01,730.13 1344.01,801.15
  rectangle net OR_3.3V: 877.22,1173.99 957.56,1241.5
  rectangle net NetR10_2: 1172.13,1044.13 1195.75,1138
  rectangle net NetR11_2: 1122.13,1044.13 1145.75,1138.01
  rectangle net +3V3: 992.69,1128.99 1057.69,1146.99
  rectangle net +5V_OUT: 1027.19,1066.82 1095.75,1091.82
  rectangle net +5V_OUT: 673.5,1057 708.5,1147
  rectangle net +5V_OUT: 599.56,1119.44 708.5,1174.56
  rectangle net NetF1_2: 596.61,926.37 651.72,1087.82
  rectangle net NetD5_1: 489.52,1016.16 544.44,1174.56
  rectangle net NetC6_2: 243.5,979.25 317.04,1048.5
  rectangle net NetC6_2: 117.04,639.1 152.48,979.25
  rectangle net NetC6_2: 134.76,621.38 317.04,656.81
  rectangle net NetC6_2: 134.76,961.54 317.04,996.97
  rectangle net USB_P: 533.66,756.56 588.35,773.5
  rectangle net USB_N: 533.51,818.5 588.19,835.17

## Silkscreen, mask and mechanical layers (free items; w line width, h text height)
Top Overlay:
  text "BATTERY" at 654.59,1527.45 h30
  text "BOOT" at 2535.02,1517.41 h30
  text "Webbie V3.0" at 2953.75,1478.01 h50
  text "BATT CON" at 2189.87,1273.32 h30 r90
  text "+" at 2154.74,1209.63 h50
  text "-" at 1759.59,1201.49 h50
  text "+" at 2154.74,1155.56 h50
  text "-" at 1759.59,1155.2 h50
  text "POWER" at 17.74,1074.7 h30
  text "RESET" at 24.44,122.56 h30
  text "WIFI/ETHERNET" at 560.85,24.44 h30
  text "RESET" at 2544.02,17 h30
Board Outline:
  lines w10: 3887.01,0 ccw(c3887.01,50) 3937.01,50 ; 3887.01,0.22 2311.67,0.22 2311.67,242.23 1597.76,242.23 1597.76,0 50,0 cw(c50,50) 0,50 0,1524.8 cw(c50,1524.8) 50,1574.8 1807.08,1574.8 cw(c1807.08,1574.78) 1807.1,1574.78 1807.1,1551 ccw(c1857.1,1551) 1857.1,1501 2110.39,1501 ccw(c2110.39,1551) 2160.39,1551 2160.39,1574.8 ; 2160.39,1574.8 ccw(c2160.39,1574.8) 2160.39,1574.8 ; 2160.39,1574.8 3817.37,1574.8 ; 3817.37,1574.8 ccw(c3817.37,1574.8) 3817.37,1574.8 ; 3817.37,1574.8 ccw(c3817.37,1574.8) 3817.37,1574.8 ; 3817.37,1574.8 3887.01,1574.8 cw(c3887.01,1524.8) 3937.01,1524.8 3937.01,1064 3936.69,1064 3568,1064 3568,514.1 3937.01,514.1 3937.01,50 ; 3937.01,50 3937.01,50

## Text inside footprints (layer, text, board x,y; h text height)
J3: Mechanical 13 "Board Cutout" at 3748.48,1010.09 h39.37 r270; Top Overlay "1" at 3423.17,968.92 h31.5 r270